# Altium PCB Calefactor.PcbDoc
Units mil, origin at the board's own origin, x right, y up, seen from the top; angles counter-clockwise.
Board outline 6000 x 4000 mil, 2 copper layers (Top Layer, Bottom Layer); 13 components, 6 nets, 20 pads, 0 vias.
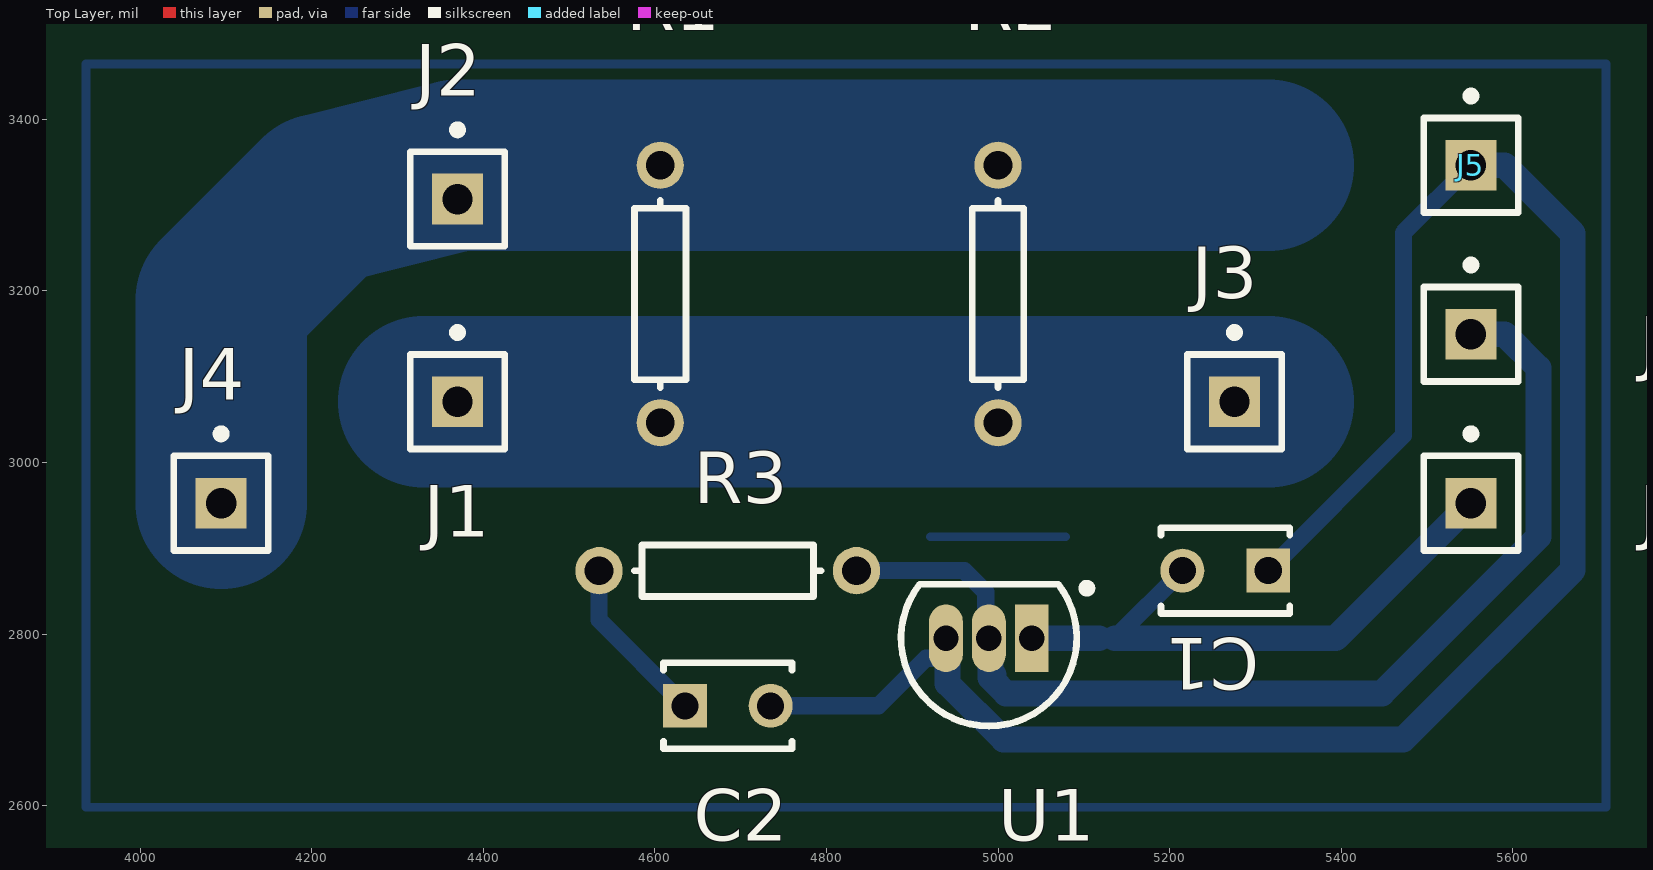
[diagram p0: Top Layer view]
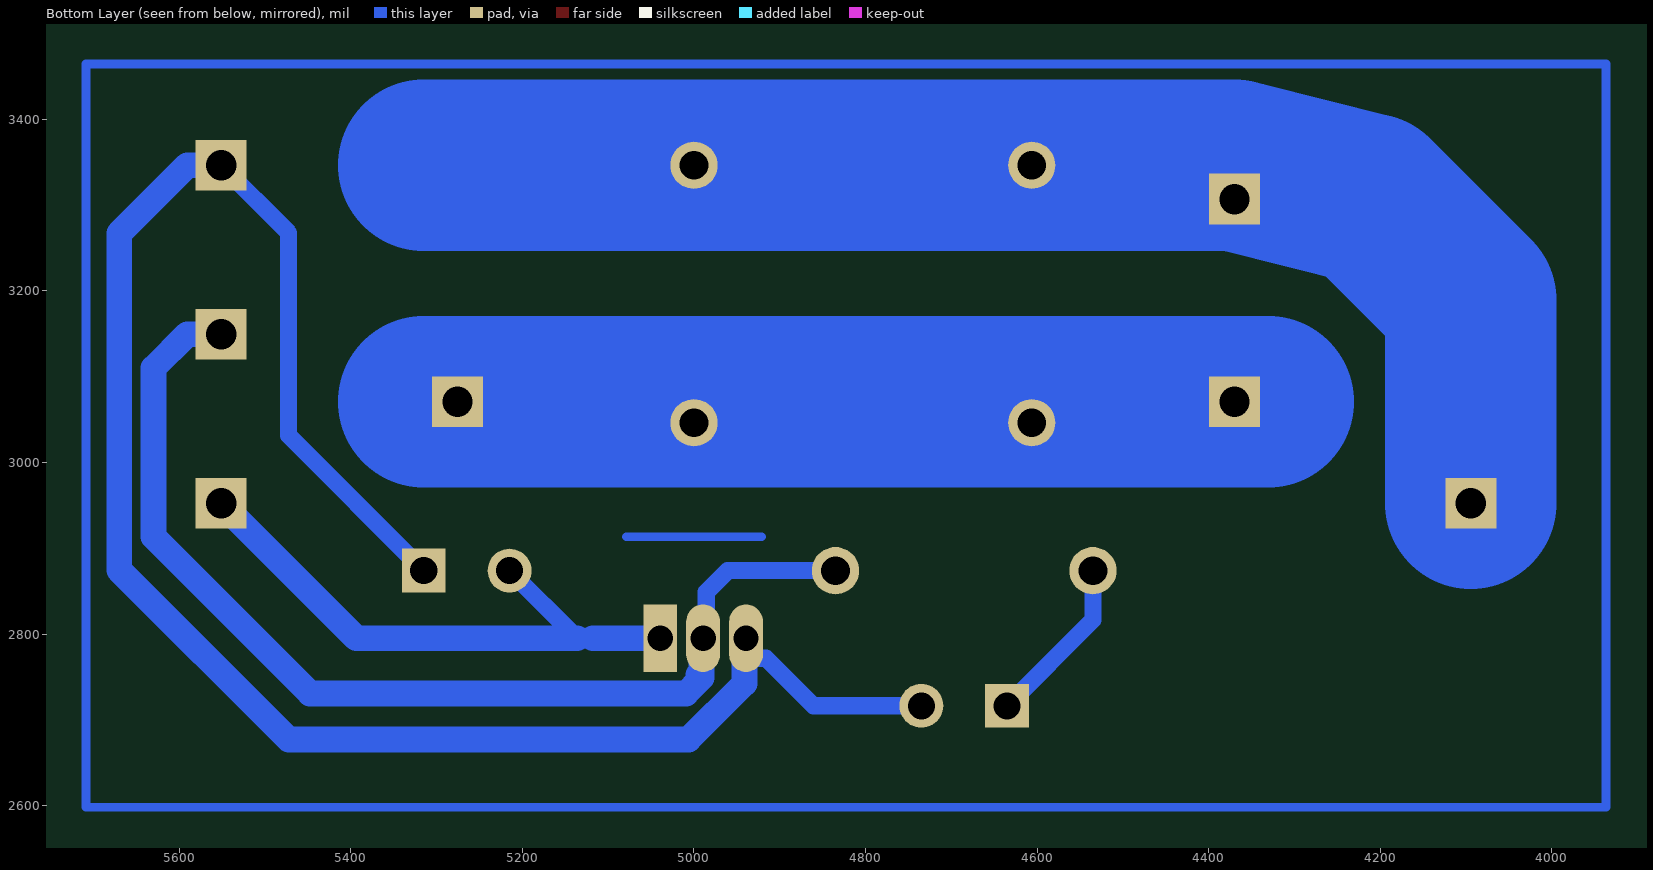
[diagram p1: Bottom Layer view, seen from below]

## Layer stack, top to bottom
Top Solder: solder mask 0.4, Solder Resist, Dk 3.5
Top Layer: signal copper 1.4
Dielectric 1: dielectric 12.6, FR-4, Dk 4.8
Bottom Layer: signal copper 1.4
Bottom Solder: solder mask 0.4, Solder Resist, Dk 3.5

## Board outline
1000,1000 7000,1000 7000,5000 1000,5000

## Design rules (kind name [scope] priority, off if disabled: settings)
Clearance [All] p1: gap=10 ignorepadtopadclearanceinfootprint=FALSE except(0: Arc-Hole Track-Hole SMDPad-Hole THPad-Hole Via-Hole Fill-Hole Poly-Hole Region-Hole Text-Hole)
PolygonConnect [All] p1: connectstyle=Relief reliefconductorwidth=10 reliefentries=4 polygonreliefangle="90 Angle" airgapwidth=10
RoutingVias [All] p1: holewidth=28 width=50 viastyle="Through Hole" minholewidth=28 minwidth=50 maxholewidth=28 maxwidth=50
SolderMaskExpansion [All] p1: expansion=4
Width [All] p1: maxlimit=240 minlimit=10 preferedwidth=20 minimp=50.000000 maximp=50.000000 favimp=50.000000
30 further rules are at their usual default settings.

## Components (designator, comment, footprint, x,y, rotation, side; value= is the part's Value field where it differs from the comment)
C1 "0.01 uF" KEMT-C315-THT-2 5264.96,2874.02 r180 top
C2 "1 uF" KEMT-C315-THT-2 4685.04,2716.54 r0 top
J1 "12V" PIN1 4370.08,3070.87 r0 top
J2 "GND" PIN1 4370.08,3307.09 r0 top
J3 "12 V" PIN1 5275.59,3070.87 r0 top
J4 "GND" PIN1 4094.49,2952.76 r0 top
J5 "GND" PIN1 5551.18,3346.46 r0 top
J6 "OUT" PIN1 5551.18,3149.61 r0 top
J7 "5V" PIN1 5551.18,2952.76 r0 top
R1 "Res1" AXIAL-0.3 4606.3,3196.46 r270 top value=3.6
R2 "Res1" AXIAL-0.3 5000,3196.46 r270 top value=3.6
R3 "Res1" AXIAL-0.3 4685.04,2874.02 r0 top value=330 (schematic designator R?)
U1 "LM35DZ" Z03A 4989.37,2795.28 r90 top

## Footprints (in the part's own frame and the unit in brackets; to place one, negate y for a bottom-side part, rotate by r counter-clockwise, add the part's x,y. Pads: shape width x height; smd on the part's side, far side on the other; paste and mask are expansions set on the pad)
AXIAL-0.3 [mm] "Axial Device, Thru-Hole; 2 Leads; 0.3 in Pin Spacing"
  round 1.4 hole 0.85: 1(-3.81,0) 2(3.81,0)
  silkscreen extent -2.77,-0.76 2.77,0.76
KEMT-C315-THT-2 [mm] "THD, 2-Leads, Body 3.81x2.54mm"
  rect 1.3x1.3 hole 0.8: 1(-1.27,0)
  round 1.3 hole 0.8: 2(1.27,0)
  silkscreen extent -1.91,-1.27 1.91,1.27, body extent -1.91,-1.27 1.91,1.27, height 4.66
PIN1 [mm] "Connector; Plug"
  rect 1.5x1.5 hole 0.9: 1(0,0)
  silkscreen extent -1.4,-1.4 1.4,2.17
Z03A [mm] "TO, Flat Index; 3 In-Line, Axial Leads; Body Dia. 5mm; Leads 0.55 x 0.50 mm (max)"
  rect 2x1 hole 0.75: 1(0,-1.27)
  oval 2x1 hole 0.75: 2(0,0) 3(0,1.27)
  silkscreen extent -2.6,-3.03 1.6,2.6, body extent -2.6,-2.61 1.6,2.61, height 5.2

## Part data
C1 C2: library part CMP-1664-00010-1, "Capacitor, Ceramic, 1000 pF, +/-10 %, 100 V, X7R, -55 to 125 degC, 2-Pin THD, RoHS, Bulk", Case\Package=DFN, Max Operating Temperature="125 degC", Max Supply Voltage="3.6 V", Min Operating Temperature="-40 degC", Min Supply Voltage="1.5 V", Nominal Supply Voltage="3 V", ComponentLink1Description="Manufacturer URL", ComponentLink1URL=http://www.kemet.com/, ComponentLink2Description=Datasheet, ComponentLink2URL=http://capacitoredge.kemet.com/capedge2/DataSheet/Datasheet-C315C102K1R5TA.pdf?pn=C315C102K1R5TA{BULK}, DatasheetVersion=Aug-16, Interface=Serial, Mount="Surface Mount", PackageDescription="2-Pin Through Hole Device, Body 3.81 x 2.54 mm", PackageReference=C315-THT-2, Packaging="Tape and Reel", Pins=6, Radiation Hardening=No, REACH SVHC=Unknown, RoHSCompliant=true
J1 J2 J3 J4 J5 J6 J7: library part Socket, "Socket", LatestRevisionDate=17-Jul-2002, LatestRevisionNote="Re-released for DXP Platform.", Publisher="Altium Limited"
R1 R2 R3: "Resistor", LatestRevisionDate=17-Jul-2002, LatestRevisionNote="Re-released for DXP Platform.", PackageDescription="Axial Device, Thru-Hole; 2 Leads; 0.3 in Pin Spacing", PackageReference=AXIAL-0.3, Published=8-Jun-2000, Publisher="Altium Limited"
U1: library part CMP-0066-00031-2, "Precision Centigrade Temperature Sensor, 3-pin TO-92", Manufacturer="National Semiconductor", PackageTopMarking=NSXYTT*LM35*DZ, PowerWise=N, Code_JEDEC=TO-226-AA, ComponentLink1Description="LM35 Datasheet", ComponentLink1URL=http://www.national.com/ds/LM/LM35.pdf, ComponentLink2Description="LM35 Web Page", ComponentLink2URL=http://www.national.com/pf/LM/LM35.html, ComponentLink3Description="Z03A Package Page", ComponentLink3URL=http://www.national.com/packaging/folders/z03a.html, CompType="Temp Sensor IC", DatasheetVersion=Nov-2000, PackageDescription="TO-92, Molded, 3 Lead", PackageReference=Z03A, PackageVersion="revG, Sep-2000", PinCount=3, RevisionNote="Component URLs added", RoHS=N

## Nets (pads, with @x,y where several pads share a name; then routed paths per layer and width w, separated by ;. In a path a pad name is that pad's centre, name@x,y a point inside that pad or via, vN(x,y) a via of type N, cw(c..) or ccw(c..) an arc to the next point about the centre after c; other vN are vias at no path point)
NetC1_1: C1.1 C2.2 J5.1 U1.3 | length 2250.9
  Bottom Layer w20: C2.2 4860.63,2716.54 4915.98,2771.88 4930.42,2771.88 4939.37,2780.83 U1.3 ; C1.1 5472.44,3031.5 5472.44,3267.72 J5.1
  Bottom Layer w30: U1.3 4941.16,2793.48 4941.16,2742.5 5006.5,2677.17 5472.44,2677.17 5669.92,2874.65 5669.92,3267.09 5590.55,3346.46 J5.1
NetC1_2: C1.2 J7.1 U1.1 | length 695
  Bottom Layer w20: 5118.11,2795.28 5136.22,2795.28 C1.2
  Bottom Layer w30: U1.1@5034.69,2790.59 U1.1 5118.11,2795.28 ; 5136.22,2795.28 5393.7,2795.28 5472.44,2874.02 J7.1
NetC2_1: C2.1 R3.1 | length 198.9
  Bottom Layer w20: R3.1 4535.12,2873.94 4535.12,2816.46 C2.1
NetJ1_1: J1.1 J3.1 R1.2 R2.2 | length 984.3
  Bottom Layer w200: 4330.71,3070.87 4606.3,3070.87 5000,3070.87 5246.06,3070.87 5314.96,3070.87
NetJ2_1: J2.1 J4.1 R1.1 R2.1 | length 1510.5
  Bottom Layer w200: J4.1 4094.49,3188.98 4212.6,3307.09 4360.82,3344.14 4370.08,3346.46 R1.1 R2.1 5314.96,3346.46
NetJ6_1: J6.1 R3.2 U1.2 | length 1284
  Bottom Layer w20: R3.2 4960.63,2874.02 4985.66,2848.98 4985.66,2798.98 U1.2
  Bottom Layer w30: U1.2 4991.16,2793.48 4991.16,2749.07 4994.69,2752.59 4994.69,2745.55 5009.33,2730.91 5447.44,2730.91 5629.92,2913.39 5629.92,3110.24 5590.55,3149.61 J6.1
copper on no net: | length 5433.1
  Bottom Layer w10: 4921.26,2913.39 5078.74,2913.39 ; 3937.01,2598.43 5708.66,2598.43 5708.66,2785.43 5708.66,3238.19 5708.66,3464.57 3937.01,3464.57 3937.01,2598.43